# Altium PCB brakeLight.PcbDoc
Units mil, origin at the board's own origin, x right, y up, seen from the top; angles counter-clockwise.
Board outline 6000 x 4000 mil, 2 copper layers (Top Layer, Bottom Layer); 13 components, 2 nets, 26 pads, 6 vias.
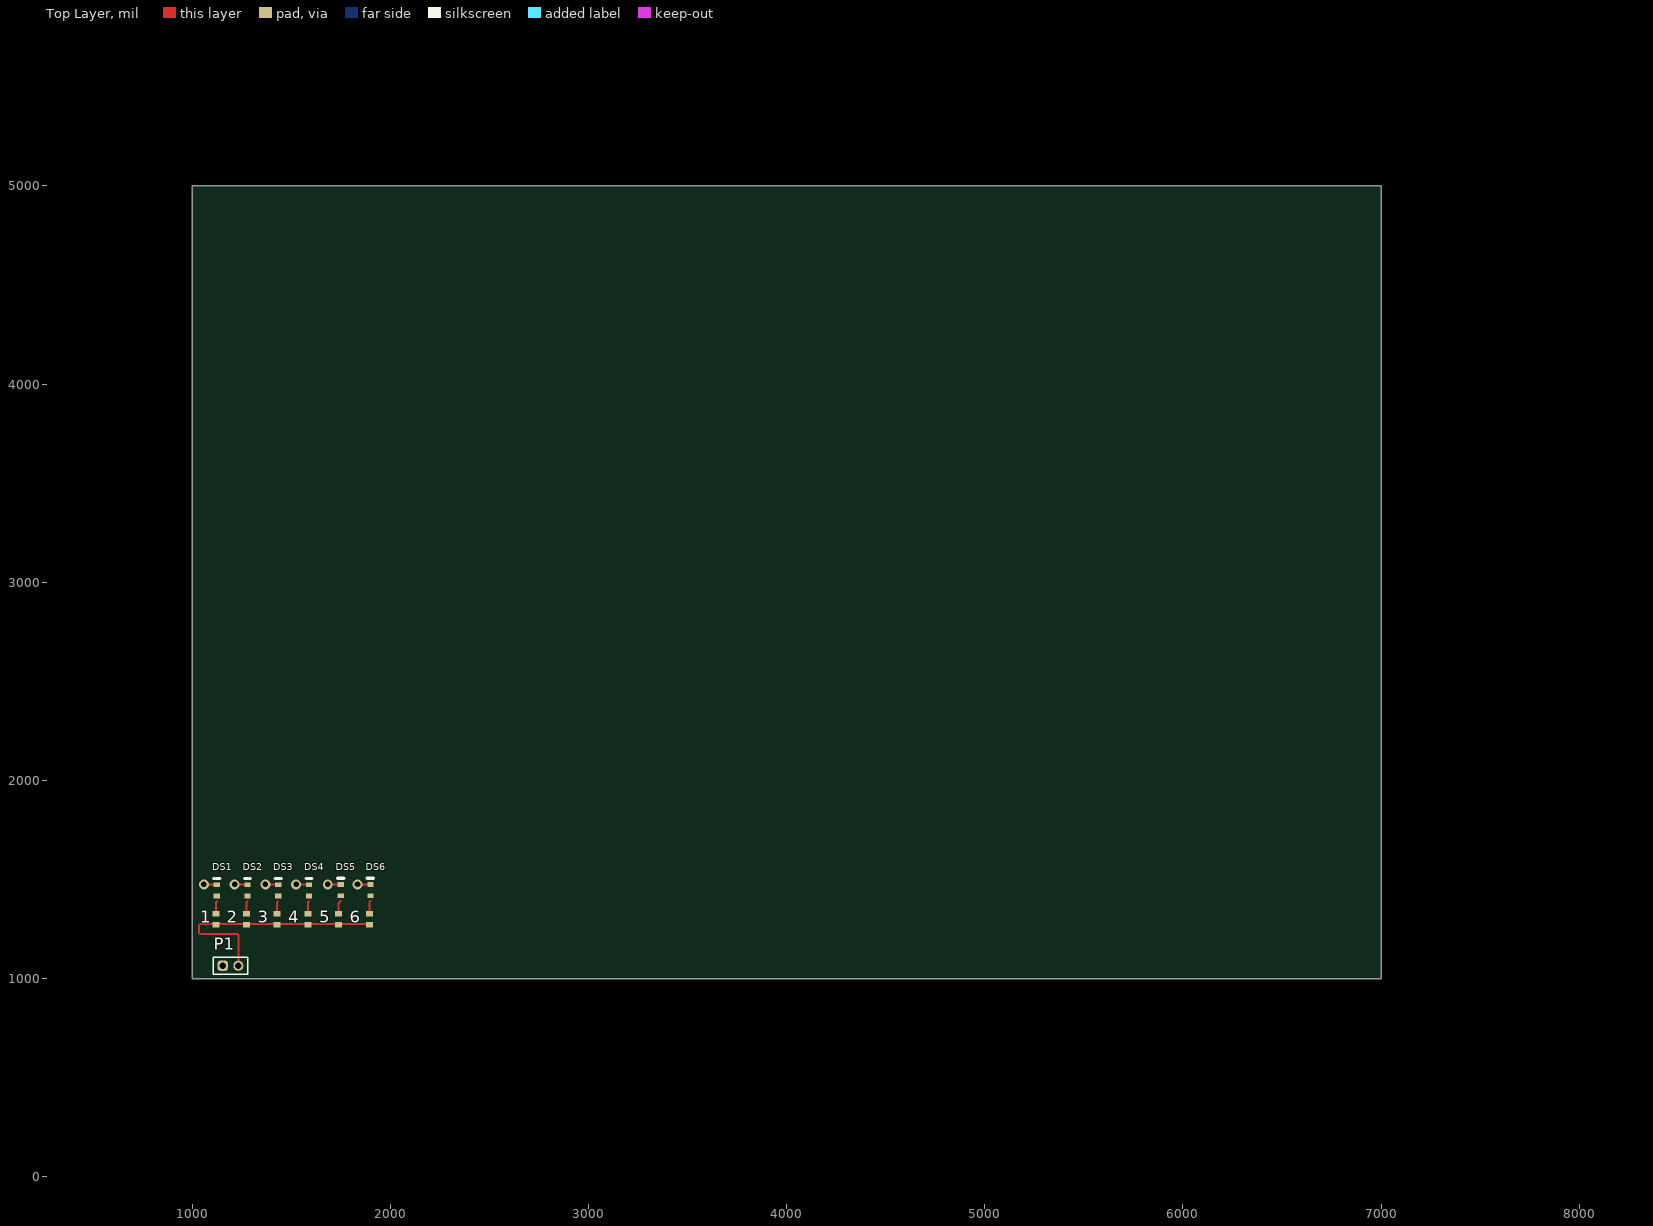
[diagram p0: Top Layer view]
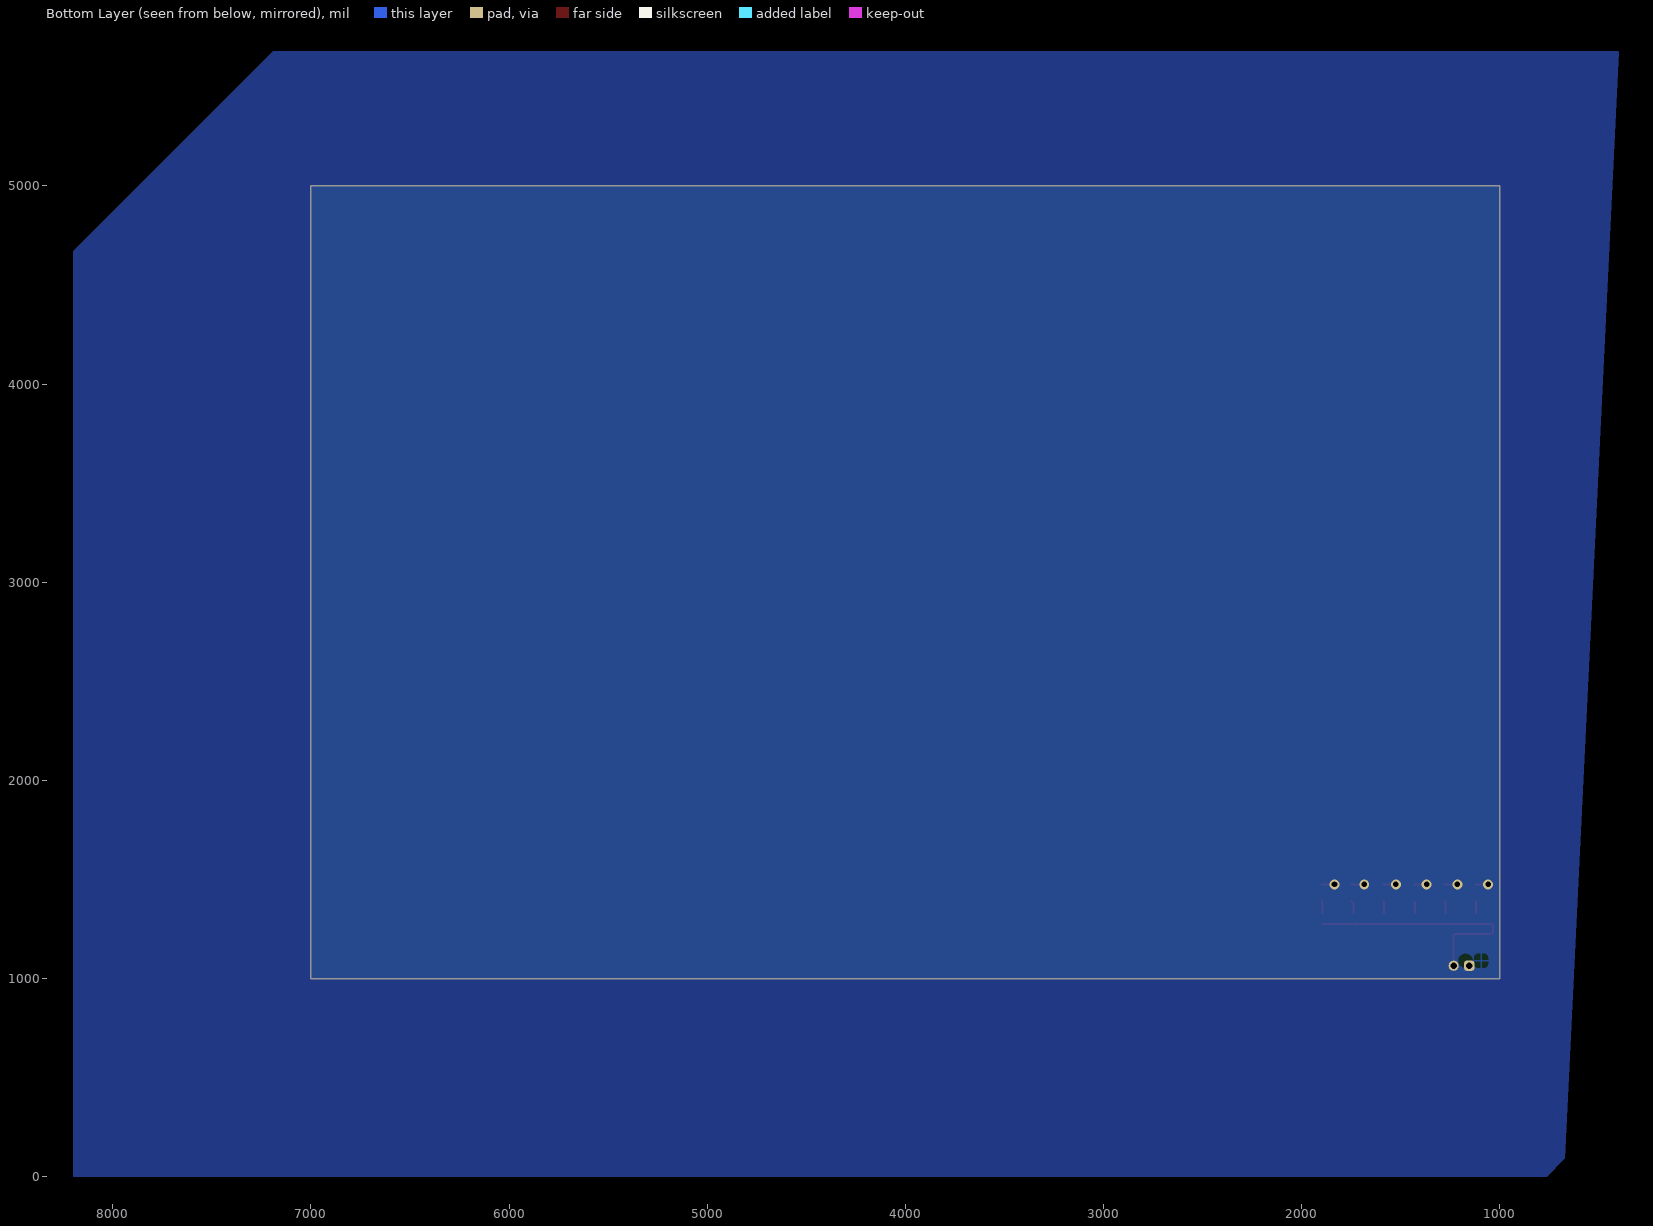
[diagram p1: Bottom Layer view, seen from below]

## Layer stack, top to bottom
Top Solder: solder mask 0.4, Solder Resist, Dk 3.5
Top Layer: signal copper 1.4
Dielectric 1: dielectric 12.6, FR-4, Dk 4.8
Bottom Layer: signal copper 1.4
Bottom Solder: solder mask 0.4, Solder Resist, Dk 3.5

## Board outline
1000,1000 7000,1000 7000,5000 1000,5000

## Design rules (kind name [scope] priority, off if disabled: settings)
Clearance [All] p1: gap=10 ignorepadtopadclearanceinfootprint=FALSE except(0: Arc-Hole Track-Hole SMDPad-Hole THPad-Hole Via-Hole Fill-Hole Poly-Hole Region-Hole Text-Hole)
PolygonConnect [All] p1: connectstyle=Relief reliefconductorwidth=10 reliefentries=4 polygonreliefangle="90 Angle" airgapwidth=10
RoutingVias [All] p1: holewidth=28 width=50 viastyle="Through Hole" minholewidth=28 minwidth=50 maxholewidth=28 maxwidth=50
SolderMaskExpansion [All] p1: expansion=4 istentingtop=FALSE
Width [All] p1: maxlimit=10 minlimit=10 preferedwidth=10
30 further rules are at their usual default settings.

## Components (designator, comment, footprint, x,y, rotation, side; value= is the part's Value field where it differs from the comment)
1 "RC0603FR-07330RL" RESC1608X55X25NL10T15 1120,1300 r270 top
2 "RC0603FR-07330RL" RESC1608X55X25NL10T15 1275,1300 r270 top
3 "RC0603FR-07330RL" RESC1608X55X25NL10T15 1430,1300 r270 top
4 "RC0603FR-07330RL" RESC1608X55X25NL10T15 1585,1300 r270 top
5 "RC0603FR-07330RL" RESC1608X55X25NL10T15 1740,1300 r270 top
6 "RC0603FR-07330RL" RESC1608X55X25NL10T15 1895,1300 r270 top
DS1 "TLMS1100-GS08" VISH-TLMX1100_V 1125,1445 r90 top
DS2 "TLMS1100-GS08" VISH-TLMX1100_V 1280,1445 r90 top
DS3 "TLMS1100-GS08" VISH-TLMX1100_V 1435,1445 r90 top
DS4 "TLMS1100-GS08" VISH-TLMX1100_V 1590,1445 r90 top
DS5 "TLMS1100-GS08" VISH-TLMX1100_V 1750,1446.46 r90 top
DS6 "TLMS1100-GS08" VISH-TLMX1100_V 1900,1446.46 r90 top
P1 "62000211121" 62000211121 1194.37,1065 r0 top

## Footprints (in the part's own frame and the unit in brackets; to place one, negate y for a bottom-side part, rotate by r counter-clockwise, add the part's x,y. Pads: shape width x height; smd on the part's side, far side on the other; paste and mask are expansions set on the pad)
62000211121 [mm] "Pin Header, pitch 2.00 mm, THT, Vertical, single row, 2p"
  rrect50% 1.3x1.3 hole 0.8: 1(-1,0)
  round 1.3 hole 0.8: 2(1,0)
  silkscreen extent -2.2,-1.07 2.2,1.07, body extent -2,-1 2,1, height 6.05
RESC1608X55X25NL10T15 [mm] "Chip Resistor, 2-Leads, Body 1.70x0.90mm, IPC Medium Density"
  rect 0.7x0.9 smd: 1(-0.7,0) 2(0.7,0)
  body extent -0.85,-0.45 0.85,0.45, height 0.55
VISH-TLMX1100_V [mm] "SMD, 2-Leads, Body 1.6x0.8mm"
  rect 0.6x0.8 smd: 1(-0.725,0) 2(0.725,0)
  silkscreen extent 1.53,-0.4 1.53,0.4, body extent -0.8,-0.4 0.8,0.4, height 0.65

## Part data
1 2 3 4 5 6: library part CMP-1659-00020-2, "Chip Resistor, 330 Ohm, +/- 1%, 0.1 W, -55 to 155 degC, 0603 (1608 Metric), RoHS, Tape and Reel", Capacitance="47 uF", Case Code (Imperial)=2917, Case Code (Metric)=7343, Max Operating Temperature=125degC, Min Operating Temperature=-55degC, Package Quantity=500, Tolerance=10%, Voltage Rating="16 V", Case/Package=2917, ComponentLink1Description="Manufacturer URL", ComponentLink1URL=http://www.yageo.com/, ComponentLink2Description=Datasheet, ComponentLink2URL=http://www.yageo.com/documents/recent/PYu-RC_Group_51_RoHS_L_04.pdf, DatasheetVersion="Rev. 4, 02/2016", ESR="800 mohm", Height="3.1 mm", Length="7.3 mm", Mount="Surface Mount", PackageDescription="2-Pin Surface Mount Device, Body 1.6 x 0.8 mm", PackageReference=0603, Packaging="Tape and Reel", Pins=2, Radiation Hardening=No, REACH SVHC="No SVHC", RoHSCompliant=True, Voltage Rating (DC)="16 V", Width="4.3 mm"
DS1 DS2 DS3 DS4 DS5 DS6: library part CMP-1666-00027-1, "LED, RED, 2.1 V, -40 to 100 degC, 2-Pin SMD (0603), RoHS, Tape and Reel", Capacitance="12 pF", Case Code (Imperial)=0603, Case Code (Metric)=1608, Max Operating Temperature=125degC, Min Operating Temperature=-55degC, Package Quantity=4000, Resistance="100000000000 Ohm", Tolerance=5%, Type (Capacitors)=C0G, Voltage Rating="50 V", Case/Package=0603, ComponentLink1Description="Manufacturer URL", ComponentLink1URL=http://www.vishay.com/, ComponentLink2Description=Datasheet, ComponentLink2URL=http://www.vishay.com/docs/83173/tlmb1100.pdf, DatasheetVersion="Rev. 2.7, 03/2016", Height="0.8 mm", Length="1.6 mm", Mount="Surface Mount", PackageDescription="2-Pin Surface Mount Device, Body 1.6 x 0.8 mm", PackageReference=TLMX1100, Packaging="Tape and Reel", Pins=2, Radiation Hardening=No, REACH SVHC="No SVHC", RoHSCompliant=True, Voltage Rating (DC)="50 V", Width="0.8 mm"
P1: library part CMP-1502-00956-3, Contact Resistance=20mΩ, Current Rating=2A, Max Operating Temperature=105°C, Min Operating Temperature=-40°C, Operating Supply Voltage=200V, Contact Material=Gold, Gender=Male, Height=6.35mm, Lead Pitch=2mm, NexarPartId=61924778, Number of Contacts=2, Number of Pins=2, Number of Rows=1, Orientation=Vertical, RoHS=Non-Compliant, Voltage Rating=200V

## Via types
v1: diameter 50, hole 28, Top Layer to Bottom Layer, 6 vias

## Nets (pads, with @x,y where several pads share a name; then routed paths per layer and width w, separated by ;. In a path a pad name is that pad's centre, name@x,y a point inside that pad or via, vN(x,y) a via of type N, cw(c..) or ccw(c..) an arc to the next point about the centre after c; other vN are vias at no path point)
GND: DS1.2 DS2.2 DS3.2 DS4.2 DS5.2 DS6.2 P1.1 | length 392.4
  Top Layer w10: v1(1060,1475) 1060.73,1474.27 1124.27,1474.27 DS1.2 ; v1(1215,1475) 1215.73,1474.27 1279.27,1474.27 DS2.2 ; v1(1370,1475) 1370.73,1474.27 1434.27,1474.27 DS3.2 ; v1(1525,1475) 1525.73,1474.27 1589.27,1474.27 DS4.2 ; v1(1685,1475) DS5.2 ; v1(1835,1475) DS6.2
Net1_2: 1.2 2.2 3.2 4.2 5.2 6.2 P1.2 | length 1282.9
  Top Layer w10: P1.2 1233.74,1219.14 1227.88,1225 1040.86,1225 1035,1230.86 1035,1269.14 1040.86,1275 3.2@1432.56,1275 ; 3.2 3.2@1432.56,1275 ; 3.2@1435,1277.44 3.2@1432.56,1275 ; 5.2@1727.28,1281.22 5.2@1733.5,1275 ; 5.2 1736.06,1272.44 5.2@1733.5,1275 ; 6.2 1892.44,1275 5.2@1733.5,1275 ; 3.2@1432.56,1275 5.2@1733.5,1275
pads on no net: 1.1 2.1 3.1 4.1 5.1 6.1 DS1.1 DS2.1 DS3.1 DS4.1 DS5.1 DS6.1
copper on no net: | length 389.9
  Top Layer w10: 1120,1327.56 1120,1384.65 1125,1389.65 ; 1275,1327.56 1275,1384.65 1280,1389.65 ; 1430,1327.56 1430,1384.65 1435,1389.65 ; 1585,1327.56 1585,1384.65 1590,1389.65 ; 1740,1327.56 1740,1381.1 1750,1391.1 ; 1895,1327.56 1895,1386.1 1900,1391.1

## Polygon pours and split planes (outlines as drawn)
GND on Bottom Layer "GND_L02_P001" (solid, pour order 1): 400,5680 7190,5680 8200,4670 8200,0 765,0 675,90 675,75